# EAGLE board GasALIM (EAGLE 7.6.0)
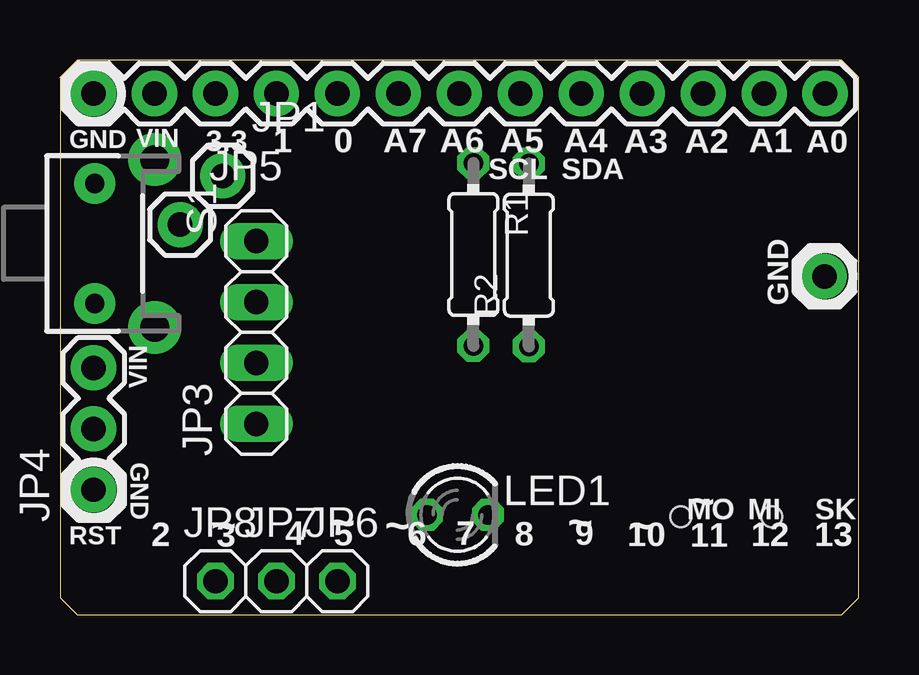
[diagram p0: board, top side]
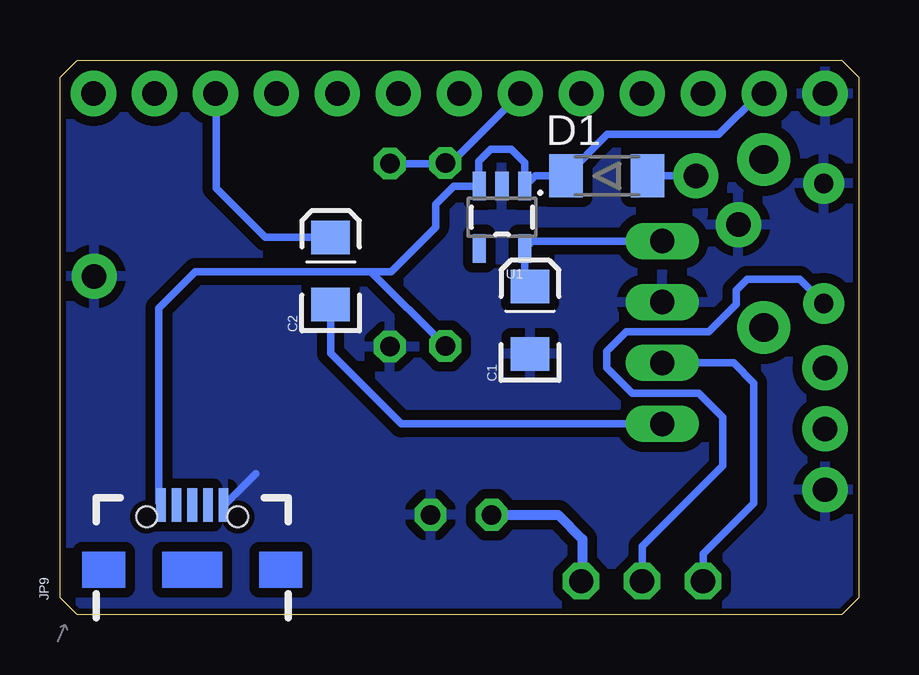
[diagram p1: board, bottom side, seen from below]

Size 33.27 x 23.11 mm. Coordinates in mm from the lower left corner, seen from the top.
Outline: 0.71,0 32.56,0 33.27,0.71 33.27,22.4 32.56,23.11 0.71,23.11 0,22.4 0,0.71 0.71,0
Copper layers (1*16): Top 0.035mm / dielectric 1.5mm / Bottom 0.035mm
Design rules "ITEADstudio_DRC *": minimum track width 6mil, minimum drill 12mil, track to track 16mil, track to pad 16mil, pad to pad 6mil, via to via 6mil, smd to smd 0mil, copper to edge 10mil, drill to drill 10mil, minimum pad ring 10mil, minimum via ring 6mil, stop-mask expansion 2mil, vias tented up to drill 100mil, thermal gap 15mil
Net classes: 1 power: width 0.381 mm, clearance 0.254 mm

## Footprints (pad centres in the part's own frame; a part is rotated, then mirrored left to right if it is on the bottom)
1X13 = drill 1.016 pad 1.88: 1 0,0; 2 2.54,0; 3 5.08,0; 4 7.62,0; 5 10.16,0; 6 12.7,0; 7 15.24,0; 8 17.78,0; 9 20.32,0; 10 22.86,0; 11 25.4,0; 12 27.94,0; 13 30.48,0
EIA3216 = smd 1.4 x 1.6: A 1.4,0; C -1.4,0
MELF-MLL34 = smd 1.4 x 1.8: 1 -1.7,0; 2 1.7,0
1X01 = drill 1.016 pad 1.88: 1 0,0
1X04 = drill 1.016 long: 1 -3.81,0; 2 -1.27,0; 3 1.27,0; 4 3.81,0
1X03 = drill 1.016 pad 1.88: 1 0,0; 2 2.54,0; 3 5.08,0
1X01' = drill 1.016 octagon: 1 0,0
USB-AB-MICRO-SMD_V03 = smd 1.4 x 0.4: D+1 2.7,0; D-1 2.7,0.65; GND1 2.7,-1.3; ID1 2.7,-0.65; VBUS1 2.7,1.3 | hole 0.85: 2.2,1.9; 2.2,-1.9
LED3MM = drill 0.813 octagon: A -1.27,0; K 1.27,0
0204/7 = drill 0.813 octagon: 1 -3.81,0; 2 3.81,0
TACTILE-PTH-SIDEEZ = drill 0.8 pad 1.7: 1 -2.5,0; 2 2.5,0 | drill 1.2 pad 2.2: ANCHOR1 -3.5,2.5; ANCHOR2 3.5,2.5
SOT23-5@1 = smd 0.55 x 1.2: 1 -0.95,-1.3; 2 0,-1.3; 3 0.95,-1.3; 4 0.95,1.3; 5 -0.95,1.3

## Placement (x,y rotation side)
ANALOGSIDE  M13  [1X13]  31.88,21.72 180 top
C1  10uF  [EIA3216]  13.69,12.27 90 bottom
C2  10uF  [EIA3216]  22,14.33 90 bottom
D1  [MELF-MLL34]  10.49,18.29 0 bottom
JP1  M01PTH  [1X01]  6.78,18.29 0 top
JP2  M01PTH  [1X01]  31.85,14.1 0 top
JP3  [1X04]  8.18,11.76 90 top
JP4  [1X03]  1.4,5.21 90 top
JP5  M01PTH  [1X01]  5,16.26 0 top
JP6  [1X01']  11.56,1.4 0 top
JP7  [1X01']  9.02,1.4 0 top
JP8  [1X01']  6.48,1.4 0 top
JP9  Micro USB  [USB-AB-MICRO-SMD_V03]  27.76,1.88 90 bottom
LED1  [LED3MM]  16.56,4.17 0 top
R1  [0204/7]  17.22,15.01 270 top
R2  [0204/7]  19.53,14.99 90 top
S1  SWITCH-MOMENTARY-2SIDE_EZ  [TACTILE-PTH-SIDEEZ]  1.45,15.47 270 top
U1  [SOT23-5@1]  14.86,16.56 180 bottom

## Library data of the parts
ANALOGSIDE JP1 JP2 JP4 JP5 = SparkFun-Connectors
C1 C2 = SparkFun-Capacitors; PROD_ID: CAP-00811
D1 = semicon-smd-ipc
JP3 JP6-JP8 = pinhead
JP9 = SparkFun-Connectors; PROD_ID: CONN-11794
LED1 = led
R1 R2 = rcl
S1 = SparkFun-Electromechanical
U1 = SparkFun-PowerIC; PROD_ID: VREG-00823

## Nets
AGND [power]: JP4.1
GND [power]: ANALOGSIDE.13 C1.C JP3.3 JP5.1 R2.1 S1.1 U1.2
GND1 [power]: JP2.1 JP9.GND1 LED1.K
N$1: JP7.1 S1.2
N$2: JP3.2 JP8.1
N$3: C2.C JP3.1
N$4: ANALOGSIDE.3 C2.A
N$6: ANALOGSIDE.8 R1.1 R2.2
N$7: JP6.1 LED1.A
N$8: D1.2 JP1.1
N$10: C1.A JP3.4 U1.5
VCC: JP4.3
VIN: ANALOGSIDE.12 D1.1 JP9.VBUS1 R1.2 U1.1 U1.3

## Tracks (layer width: path | path; a pad name or v marks a point on that pad's centre or on a via)
AGND
  pour Bottom: 2.03,22.96 33.05,22.96 33.07,0.23 0.18,0.05 0.18,22.99
GND
  pour Bottom: 0.18,22.96 33.05,22.94 33.12,0.13 0.25,0.15
GND1
  Bottom 0.305: JP9.GND1 26.41,4.58 25.11,5.88
  pour Bottom: 0.28,22.96 33.05,22.89 33.05,0.15 0.28,0.23
N$1
  Bottom 0.305: JP7.1 9.02,2.85 5.66,6.2 5.66,8.23 6.66,9.22 9.42,9.22 10.49,10.29 10.49,10.97 9.68,11.79 6.25,11.79 5.11,12.93 5.11,13.51 4.65,13.97 2.45,13.97 S1.2
N$2
  Bottom 0.305: JP8.1 6.48,2.54 4.37,4.65 4.37,9.65 5.21,10.49 JP3.2
N$3
  Bottom 0.305: JP3.1 19.05,7.95 22,10.9 C2.C
N$4
  Bottom 0.305: C2.A 24.72,15.73 26.77,17.78 26.77,21.69 ANALOGSIDE.3
N$6
  Bottom 0.305: ANALOGSIDE.8 16.99,18.82 R1.1 17.25,18.8 R2.2
N$7
  Bottom 0.406: LED1.A 12.52,4.17 11.51,3.15 11.51,1.45 JP6.1
N$8
  Bottom 0.305: JP1.1 D1.2
N$10
  Bottom 0.305: JP3.4 13.6,15.57 U1.5 13.91,13.89 C1.A
VIN
  Bottom 0.305: JP9.VBUS1 29.16,4.68 29.16,12.78 27.64,14.3 20.32,14.3 | R1.2 20.32,14.3 | 20.32,14.3 19.48,14.3 17.63,16.15 17.63,17.09 16.86,17.86 U1.3 15.82,17.88 15.82,18.9 15.32,19.41 14.48,19.41 13.91,18.84 U1.1 13.48,18.29 D1.1 10.46,20.02 5.82,20.02 4.12,21.72 ANALOGSIDE.12

## Text on the board
_tsilk: VIN | 3.3 | 1 | 0 | A7 | A6 | A5 | A4 | A3 | A2 | A1 | GND | A0 | SCL | SDA | GND | VIN | GND | 2 | 3 | 4 | 5 | 6 | 7 | 8 | 9 | 10 | MO | ~ | 11 | MI | 12 | SK | 13 | RST | ~ | ~ | ~ | ~ | ~